# Altium PCB LaserTagMainBoard.PcbDoc
Units mil, origin at the board's own origin, x right, y up, seen from the top; angles counter-clockwise.
Board outline 3785 x 2125 mil, 2 copper layers (Top Layer, Bottom Layer); 27 components, 24 nets, 113 pads, 8 vias.
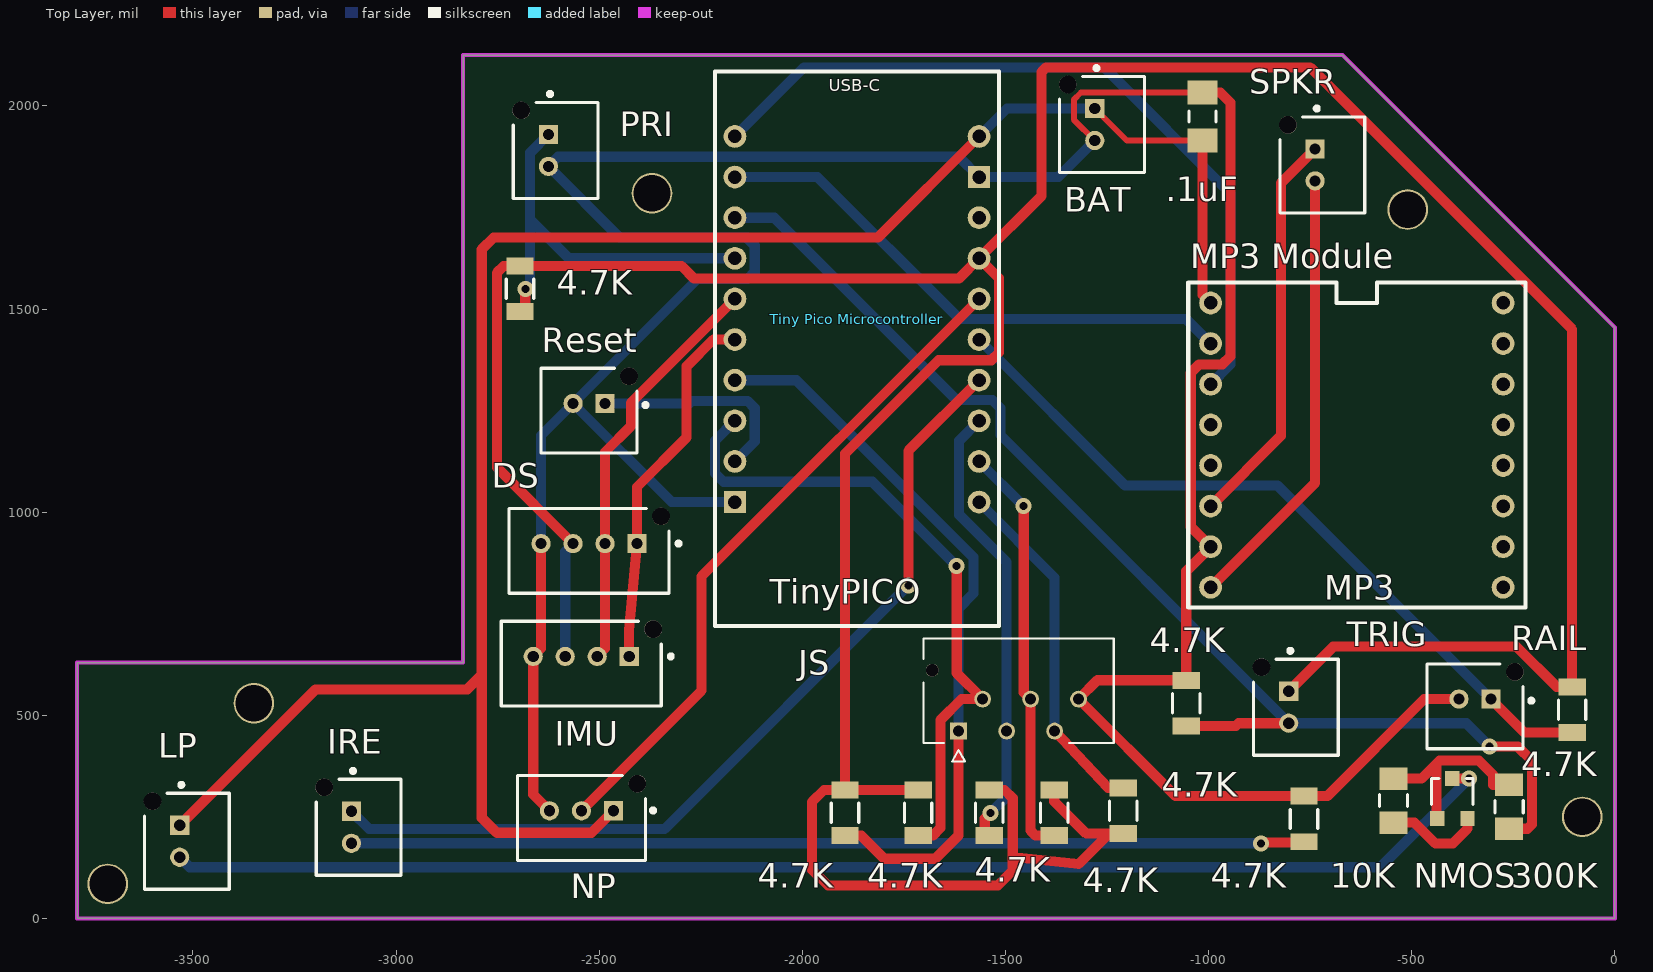
[diagram p0: Top Layer view]
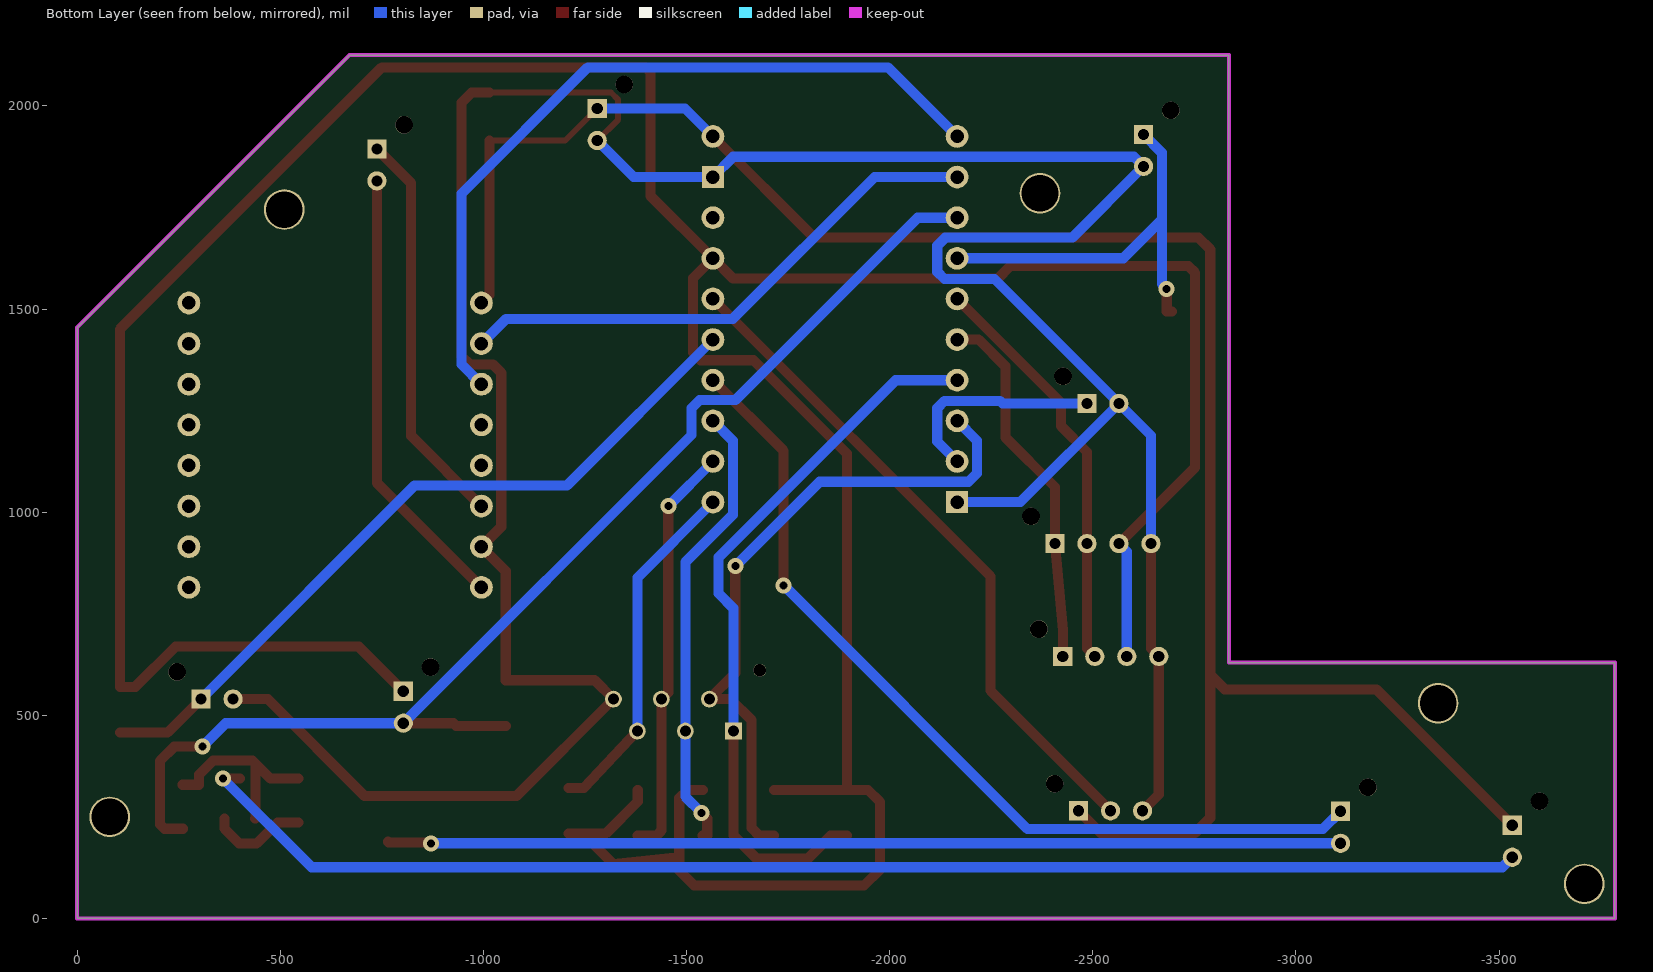
[diagram p1: Bottom Layer view, seen from below]

## Layer stack, top to bottom
Top Solder: solder mask 0.4, Solder Resist, Dk 3.5
Top Layer: signal copper 1.4
Dielectric 1: dielectric 12.6, FR-4, Dk 4.8
Bottom Layer: signal copper 1.4
Bottom Solder: solder mask 0.4, Solder Resist, Dk 3.5

## Board outline
-670,2125 0,1455 0,0 -3785,0 -3785,630 -2835,630 -2835,2125

## Design rules (kind name [scope] priority, off if disabled: settings)
BoardOutlineClearance [All] p1: gap=7.87 ignorepadtopadclearanceinfootprint=FALSE except(15.75: Arc-SplitBarrior Arc-SplitContinuation Track-SplitBarrior Track-SplitContinuation SMDPad-SplitBarrior SMDPad-SplitContinuation THPad-SplitBarrior THPad-SplitContinuation Via-SplitBarrior Via-SplitContinuation Fill-SplitBarrior Fill-SplitContinuation Poly-SplitBarrior Poly-SplitContinuation Region-SplitBarrior Region-SplitContinuation Text-SplitBarrior Text-SplitContinuation)
Clearance "Clearance Bottom Layer" [OnLayer('Bottom Layer')] p1: gap=8 ignorepadtopadclearanceinfootprint=TRUE except(10: Arc-Text Track-Text SMDPad-Text THPad-Text Via-Text Fill-Text Poly-Text Region-Text Text-Text)
Clearance "Clearance Top Layer" [OnLayer('Top Layer')] p2: gap=8 ignorepadtopadclearanceinfootprint=TRUE except(10: Arc-Text Track-Text SMDPad-Text THPad-Text Via-Text Fill-Text Poly-Text Region-Text Text-Text)
Clearance [All] p3: gap=7.87 ignorepadtopadclearanceinfootprint=FALSE except(3.5: Arc-Arc Arc-Track Arc-SMDPad Track-Track Track-SMDPad SMDPad-SMDPad; 5: Arc-Via Track-Via SMDPad-Via THPad-Via Via-Via; 10: Arc-Text Track-Text SMDPad-Text THPad-Text Via-Text Fill-Text Poly-Text Region-Text Text-Text)
HoleSize [All] p1: absolutevalues=TRUE maxlimit=248.03 minlimit=7.87 maxpercent=80.000 minpercent=20.000
MinimumAnnularRing [All] p1: minimumring=3
MinimumSolderMaskSliver [All] p1: minsoldermaskwidth=3.94
PolygonConnect PolygonConnect_1 [All] p1: thpad.connectstyle=Relief thpad.reliefconductorwidth=20 thpad.reliefentries=4 thpad.polygonreliefangle="90 Angle" thpad.airgapwidth=10 smdpad.connectstyle=Relief smdpad.reliefconductorwidth=20 smdpad.reliefentries=4 smdpad.polygonreliefangle="90 Angle" smdpad.airgapwidth=10 via.connectstyle=Direct via.reliefconductorwidth=20 via.reliefentries=4 via.polygonreliefangle="90 Angle" via.airgapwidth=10
RoutingCorners [All] p1: cornerstyle=Round minsetback=100 maxsetback=100
RoutingVias [All] p1: holewidth=19.68 width=39.37 viastyle="Through Hole" minholewidth=7.87 minwidth=17.72 maxholewidth=39.37 maxwidth=78.74
SilkToSilkClearance [All] p1: silktosilkclearance=3.94
SilkToSolderMaskClearance [IsPad] p1: minsilkscreentomaskgap=3.94 clearancetoexposedcopper=TRUE
SolderMaskExpansion [All] p1: expansion=4 istentingtop=FALSE
Width [All] p1: maxlimit=100 minlimit=3.5 preferedwidth=25 minimp=50.000000 maximp=50.000000 favimp=50.000000
25 further rules are at their usual default settings.

## Classes and differential pairs
component class LaserTagTargetBoard: Battery

## Components (designator, comment, footprint, x,y, rotation, side; value= is the part's Value field where it differs from the comment)
4.7K "RC1206FR-074K7L" FP-RC1206-0_65-IPC_B -2695,1550 r90 top (schematic designator "4.7K PUR Primer")
4.7K "RC1206FR-074K7L" FP-RC1206-0_65-IPC_B -1210,265 r270 top (schematic designator "4.7K PUR JS5")
4.7K "RC1206FR-074K7L" FP-RC1206-0_65-IPC_B -1380,260 r90 top (schematic designator "4.7K PUR JS4")
4.7K "RC1206FR-074K7L" FP-RC1206-0_65-IPC_B -1540,260 r90 top (schematic designator "4.7K PUR JS3")
4.7K "RC1206FR-074K7L" FP-RC1206-0_65-IPC_B -1715,260 r90 top (schematic designator "4.7K PUR JS2")
4.7K "RC1206FR-074K7L" FP-RC1206-0_65-IPC_B -1895,260 r90 top (schematic designator "4.7K PUR JS1")
4.7K "RC1206FR-074K7L" FP-RC1206-0_65-IPC_B -105,513.82 r90 top (schematic designator "4.7K PUR Clip")
4.7K "RC1206FR-074K7L" FP-RC1206-0_65-IPC_B -1055,530 r90 top (schematic designator "4.7K PDR Trigger")
4.7K "RC1206FR-074K7L" FP-RC1206-0_65-IPC_B -765,245 r90 top (schematic designator "4.7K PDR")
10K "RMCF1206FT10K0" FP-RMCF1206-IPC_B -545,290 r270 top
300K "RMCF1206JT300R" FP-RMCF1206-IPC_B -260,275 r90 top
.1uF "C1206C104K5RACTU" KEMT-1206-2_M -1015,1974.06 r90 top
BAT "B02B-PASK-1(LF)(SN)" FP-B02B-PASK-1_LF_SN-MFG -1262.28,1954.37 r90 top (schematic designator Battery)
DS "B04B-PASK-1(LF)(SN)" FP-B04B-PASK-1_LF_SN-MFG -2525,905 r0 top (schematic designator "Display Screen")
IMU "B04B-PASK-1(LF)(SN)" FP-B04B-PASK-1_LF_SN-MFG -2544.37,627.28 r0 top
IRE "B02B-PASK-1(LF)(SN)" FP-B02B-PASK-1_LF_SN-MFG -3092.28,224.37 r90 top (schematic designator "IR Emitter")
JS "5031590600" MOLEX_5031590600 -1615.28,461.26 r0 top (schematic designator Joystick)
LP "B02B-PASK-1(LF)(SN)" FP-B02B-PASK-1_LF_SN-MFG -3515,190 r90 top (schematic designator "Laser Pointer")
"MP3 Module" "MP3 Module" HW-247A -635,1165 r0 top
NMOS "2N7002" STM-SOT-23-3_V -400,295 r0 top
NP "B03B-PASK-1(LF)(SN)" FP-B03B-PASK-1_LF_SN-MFG -2543.74,247.28 r0 top (schematic designator "Neopixels 3V")
PRI "B02B-PASK-1(LF)(SN)" FP-B02B-PASK-1_LF_SN-MFG -2607.28,1890.63 r90 top (schematic designator Primer)
RAIL "B02B-PASK-1(LF)(SN)" FP-B02B-PASK-1_LF_SN-MFG -344.37,522.28 r0 top (schematic designator Rails)
Reset "B02B-PASK-1(LF)(SN)" FP-B02B-PASK-1_LF_SN-MFG -2525,1250 r0 top
SPKR "B02B-PASK-1(LF)(SN)" FP-B02B-PASK-1_LF_SN-MFG -720,1855 r90 top (schematic designator "Speaker Socket")
"Tiny Pico Microcontroller" "TinyPICO" TinyPICO -1865.5,1510.25 r0 top
TRIG "B02B-PASK-1(LF)(SN)" FP-B02B-PASK-1_LF_SN-MFG -785,520 r90 top (schematic designator Trigger)

## Footprints (in the part's own frame and the unit in brackets; to place one, negate y for a bottom-side part, rotate by r counter-clockwise, add the part's x,y. Pads: shape width x height; smd on the part's side, far side on the other; paste and mask are expansions set on the pad)
FP-B02B-PASK-1_LF_SN-MFG [mm]
  rect 1.2x1.2 hole 0.7 paste-1000 mask+0: 1(1,0.45)
  round 1.2 hole 0.7 paste-1000 mask+0: 2(-1,0.45)
  round 1.1 hole 1.1 unplated paste-1000 mask+0: ""(2.5,2.15)
  silkscreen extent -3,-2.65 3.65,2.65, body extent -3.1,-2.75 3.15,2.8, height 0.25
FP-B03B-PASK-1_LF_SN-MFG [mm]
  rect 1.2x1.2 hole 0.7 paste-1000 mask+0: 1(2,0.45)
  round 1.2 hole 0.7 paste-1000 mask+0: 2(0,0.45) 3(-2,0.45)
  round 1.1 hole 1.1 unplated paste-1000 mask+0: ""(3.5,2.15)
  silkscreen extent -4,-2.65 4.6,2.65, body extent -4.1,-2.75 4.15,2.8, height 0.25
FP-B04B-PASK-1_LF_SN-MFG [mm]
  rect 1.2x1.2 hole 0.7 paste-1000 mask+0: 1(3,0.45)
  round 1.2 hole 0.7 paste-1000 mask+0: 2(1,0.45) 3(-1,0.45) 4(-3,0.45)
  round 1.1 hole 1.1 unplated paste-1000 mask+0: ""(4.5,2.15)
  silkscreen extent -5,-2.65 5.72,2.65, body extent -5.1,-2.75 5.15,2.8, height 0.25
FP-RC1206-0_65-IPC_B [mil]
  rect 41.66x67.41 smd paste+0 mask+0: 1(-56.18,0) 2(56.18,0)
  silkscreen extent -24,-34 24,34
FP-RMCF1206-IPC_B [mil]
  rect 55.27x69.22 smd paste+0 mask+0: 1(-54.16,0) 2(54.16,0)
  silkscreen extent -15,-35 15,35, body extent -92,-44 92,44, height 10
HW-247A [mil]
  round 56 hole 33.25: 01(-360,50) 02(-360,-50) 03(360,350) 04(360,250) 05(360,150) 06(360,50) 07(360,-50) 08(360,-150) 09(360,-250) 10(360,-350) GND(-360,-250) Rx(-360,250) Spk1(-360,-150) Spk2(-360,-350) Tx(-360,150) Vcc(-360,350)
  silkscreen extent -415,-400 415,400
KEMT-1206-2_M [mm] "SMD, 2-Leads, Body 3.4x1.8mm, IPC Low Density"
  rect 1.5x1.9 smd: 1(-1.5,0) 2(1.5,0)
  silkscreen extent -0.35,-0.85 0.35,0.85, body extent -1.7,-0.9 1.7,0.9, height 0.88
MOLEX_5031590600 [mm]
  rect 1.05x1.05 / inner round 1.05 / far side rect 1.05x1.05 hole 0.7 mask+0.076: 1(0,0)
  round 1.05 hole 0.7 mask+0.076: 2(1.5,2) 4(4.5,2) 6(7.5,2)
  round 1.05 hole 0.7 mask+0.101: 3(3,0) 5(6,0)
  round 0.8 hole 0.8 unplated mask+0.076: ""(-1.65,3.8)
  silkscreen extent -2.2,-1.89 9.7,5.79
STM-SOT-23-3_V [mm] "SOT23, 3-Leads, Body 3.016x2.8mm, Pitch 0.95mm"
  rect 0.9x0.95 smd: 1(-0.95,-1.25) 2(0.95,-1.25) 3(0,1.25)
  silkscreen extent -1.3,-0.38 1.3,1.25, body extent -1.14,-1.25 1.17,1.36, height 1.25
TinyPICO [mil]
  round 56 hole 33.25: 3V3(300.5,114.75) 4(300.5,14.75) 5(-300.5,114.75) 5V(300.5,214.75) 14(300.5,-85.25) 15(300.5,-185.25) 18(-300.5,214.75) 19(-300.5,314.75) 21(-300.5,-85.25) 22(-300.5,14.75) 23(-300.5,414.75) 25(300.5,-485.25) 26(300.5,-385.25) 27(300.5,-285.25) 32(-300.5,-185.25) 33(-300.5,-285.25) BAT(300.5,414.75) RST(-300.5,-385.25)
  rect 54x54 hole 33.25: GND1(300.5,314.75) GND2(-300.5,-485.25)
  silkscreen extent -350,-790 350,575

## Part data
4.7K 4.7K 4.7K 4.7K 4.7K 4.7K 4.7K 4.7K 4.7K: library part CMP-03412-037805-1, "RES SMD 4.7K OHM 1% 1/4W 1206", Case Code (Imperial)=1206, Case Code (Metric)=3216, Max Operating Temperature=155°C, Max Power Dissipation=250mW, Min Operating Temperature=-55°C, Package Quantity=1, Resistance=4.7kR, Resistance Tolerance=1%, Resistor Type="Thick Film", Temperature Coefficient=100ppm/°C, Voltage Rating=200V, Case/Package=1206, Construction=Rectangular, Depth=1.6mm, Features="Moisture Resistant", Height=0.026inch, Lead Free="Lead Free", Length=0.122inch, Military Standard=Not, Number of Pins=2, Number of Terminations=2, Packaging="Tape and Reel", Power Rating=250mW, RoHS Compliant=Yes, Series=RC, Size Code=1206, Termination=SMD/SMT, Tolerance=1%, Voltage Rating (DC)=200V, Width=0.063inch
10K: library part CMP-26527-000151-1, "10kΩ ±1% 0.25W 1206 Thick Film Chip Resistor AEC-Q200 compliant", Case Code (Imperial)=1206, Case Code (Metric)=3216, Max Operating Temperature=155°C, Max Power Dissipation=250mW, Min Operating Temperature=-55°C, Resistance=10kR, Resistor Type="Thick Film", Temperature Coefficient=100ppm/°C, Tolerance=1%, Case/Package=1206, Construction=Rectangular, Contact Plating=Tin, Depth=1.6mm, Features="Automotive AEC-Q200", Height=0.028inch, Lead Free="Lead Free", Length=3.2mm, Military Standard=Not, Mount="Surface Mount", Number of Terminations=2, Packaging="Tape and Reel", Power Rating=250mW, Radiation Hardening=No, RoHS Compliant=Yes, Series=RMCF, Size Code=1206, Width=0.063inch
300K: library part CMP-26527-001830-1, "300Ω ±5% 0.25W 1206 Thick Film Chip Resistor AEC-Q200 compliant", Case Code (Imperial)=1206, Case Code (Metric)=3216, Max Operating Temperature=155°C, Max Power Dissipation=250mW, Min Operating Temperature=-55°C, Resistance=300R, Resistor Type="Thick Film", Temperature Coefficient=200ppm/°C, Tolerance=5%, Case/Package=1206, Construction=Rectangular, Contact Plating=Tin, Depth=1.6mm, Features="Automotive AEC-Q200", Height=0.028inch, Lead Free="Lead Free", Length=3.2mm, Military Standard=Not, Mount="Surface Mount", Number of Terminations=2, Packaging="Tape and Reel", Radiation Hardening=No, RoHS Compliant=Yes, Series=RMCF, Width=0.063inch
.1uF: library part CMP-1037-04202-2, "CAP, Ceramic, 0.1 uF, +/- 10%, 50 V, -55 to 125 degC, 1206 (3216 Metric), RoHS, Tape and Reel", Capacitance=0.1µF, Capacitance Tolerance=±10%, Capacitor Case Style=1206[3216Metric], Dielectric Characteristic=X7R, Manufacturer=Kemet, Operating Temperature Max=125degC, Operating Temperature Min=-55degC, Package Description="2-Leads SMD, Body 3.2 x 1.6 mm", Package Reference=1206-2, Voltage Rating=50V, Datasheet URL=https://datasheet.ciiva.com/6125/1725438-6125494.pdf, Datasheet Version=Jul-13, Manufacturer URL=http://www.kemet.com/, Packaging=Tape&Reel, Product Range=KEMET-CSeries, SVHC=ToBeAdvised
BAT IRE LP PRI RAIL Reset SPKR TRIG: library part CMP-17439-000415-1, "CONN HEADER VERT 2POS 2MM", Color=Natural, Current Rating=3A, Flammability Rating="UL94 V-0", Housing Color=White, Insulation Resistance=1GR, Max Operating Temperature=85°C, Min Operating Temperature=-25°C, Voltage Rating=250V, Connector Type=Header, Contact Finish - Mating=TIN, Contact Material="Copper Alloy", Contact Mating Length=0.126inch, Contact Plating=Tin, Contact Shape=Square, Contact Type="Male Pin", Fastening Type=Ramp, Gender=Male, Insulation Color=Natural, Insulation Material=PBT, Lead Free="Lead Free", Mated Stacking Heights=14.9mm, Material=Polybutylene, Mount="Through Hole", Number of Contacts=2, Number of Positions=2, Number of Rows=1, Orientation=Straight, Packaging=Bulk, Pitch=2mm, Series=PA, Termination=Solder
DS IMU: library part CMP-17439-000192-1, "CONN HEADER VERT 4POS 2MM", Color=Natural, Contact Resistance=20mR, Current Rating=3A, Flammability Rating="UL94 V-0", Housing Color=White, Max Operating Temperature=85°C, Max Voltage Rating (AC)=250V, Min Operating Temperature=-25°C, Connector Type=Header, Contact Finish - Mating=TIN, Contact Material="Copper Alloy", Contact Mating Length=0.126inch, Contact Plating=Copper, Contact Shape=Square, Contact Type="Male Pin", Depth=5.3mm, Fastening Type=Ramp, Gender=Male, Insulation Color=Natural, Insulation Material=PBT, Lead Free="Lead Free", Length=10mm, Mated Stacking Heights=14.9mm, Max Current Rating=3A, Mount="Through Hole", Number of Contacts=4, Number of Positions=4, Number of Rows=1, Orientation=Straight, Packaging=Bulk, Pitch=2mm, Series=PA, Termination=Solder, Voltage Rating=250V
JS: "1.50mm Pitch, CLIK-Mate PCB Receptacle, Single Row, Through Hole, Vertical, Tin Plating, Positive Lock, with Peg, 6 Circuits, Natural", Package=None, Availability=Unavailable, MP=5031590600, Price=None
"MP3 Module": library part Component_1
NMOS: library part CMP-0434-00001-1, "N-channel 60 V, 1.8 Ohm, 0.35 A STripFET(TM) II Power MOSFET, SOT23", Manufacturer=STMicroelectronics, ComponentLink1Description="Manufacturer URL", ComponentLink1URL=http://www.st.com/, ComponentLink2Description=Datasheet, ComponentLink2URL=http://www.st.com/st-web-ui/static/active/en/resource/technical/document/datasheet/CD00005134.pdf, DatasheetVersion="Rev. 9, 11/2008", Mounting Technology="Surface Mount", PackageDescription="3-Pin SOT23, 3.016 x 2.8 mm Body, 0.95 mm Pitch", PackageReference=SOT-23, PartNumber=2N7002
NP: library part CMP-17439-000193-1, "CONN HEADER VERT 3POS 2MM", Color=Natural, Current Rating=3A, Flammability Rating="UL94 V-0", Housing Color=White, Voltage Rating=250V, Connector Type=Header, Contact Finish - Mating=TIN, Contact Material="Copper Alloy", Contact Mating Length=0.126inch, Contact Plating=Tin, Contact Shape=Square, Contact Type="Male Pin", Fastening Type=Ramp, Insulation Color=Natural, Insulation Material=PBT, Lead Free="Lead Free", Mated Stacking Heights=14.9mm, Mount="Through Hole", Number of Contacts=3, Number of Positions=3, Number of Rows=1, Orientation=Straight, Packaging=Bulk, Pitch=2mm, Series=PA, Termination=Solder

## Free pads (board coordinates)
  round 100 hole 90: 1(-2370,1785) 2(-3350,530) 3(-3710,85) 4(-80,250) 5(-510,1745)

## Via types
v1: diameter 39.37, hole 19.68, Top Layer to Bottom Layer, 8 vias

## Nets (pads, with @x,y where several pads share a name; then routed paths per layer and width w, separated by ;. In a path a pad name is that pad's centre, name@x,y a point inside that pad or via, vN(x,y) a via of type N, cw(c..) or ccw(c..) an arc to the next point about the centre after c; other vN are vias at no path point)
3VESP: 4.7K.2@-105,570 4.7K.2@-1210,208.82 4.7K.2@-1380,316.18 4.7K.2@-1540,316.18 4.7K.2@-1715,316.18 4.7K.2@-1895,316.18 4.7K.2@-2695,1606.18 "Tiny Pico Microcontroller.3V3" DS.3 IMU.3 TRIG.1 | length 9294.6
  Top Layer w25: DS.3 -2752,1110.35 -2752,1589.18 -2735,1606.18 -2695,1606.18 -2297.18,1606.18 -2266,1575 -1615,1575 -1565,1625 ; 4.7K.2@-1715,316.18 -1833,316.18 -1833.18,316 -1895,316 4.7K.2@-1895,316.18 ; 4.7K.2@-1540,316.18 -1502.18,316.18 -1482,296 -1482,151 ; 4.7K.2@-1380,316.18 -1380,288 -1300.82,208.82 -1245,208.82 ; 4.7K.2@-1210,208.82 -1245,208.82 ; TRIG.1 -693,669.09 -242.09,669.09 -143,570 -105,570 -105,1450 -750,2095 -1400,2095 -1411,2084 -1411,1779 -1565,1625 ; 4.7K.2@-1895,316.18 -1946.82,316.18 -1976,287 -1976,120 -1937,81 -1519,81 -1482,118 -1482,151 ; 4.7K.2@-1895,316.18 -1895,1144 -1665,1374 -1535,1374 -1516,1393 -1516,1576 -1565,1625 ; -1482,151 -1319.82,134 -1245,208.82
  Bottom Layer w25: IMU.3 -2583.74,903.35 DS.3
BAT: "MP3 Module.Vcc" "Tiny Pico Microcontroller.BAT" .1uF.1 BAT.1 LP.1 NP.1 | length 5016.5
  Top Layer w15: BAT.1 -1201.26,1915 .1uF.1
  Top Layer w25: LP.1 -3198.09,564 -2825,564 -2789,600 ; NP.1 -2519,211 -2752,211 -2789,248 -2789,600 ; -1565,1925 -1814,1676 -2760,1676 -2789,1647 -2789,600 ; .1uF.1 -1015,1535 -995,1515
  Bottom Layer w25: -1565,1925 -1496.26,1993.74 BAT.1
CLIP: 4.7K.1@-105,457.64 "Tiny Pico Microcontroller.14" RAIL.1 | length 1860.7
  Top Layer w25: RAIL.1 -222.64,457.64 4.7K.1@-105,457.64
  Bottom Layer w25: -1565,1425 -1206,1066 -831,1066 RAIL.1
GND: 4.7K.2@-765,301.18 4.7K.2@-1055,586.18 "MP3 Module.GND" "Tiny Pico Microcontroller.GND1" "Tiny Pico Microcontroller.GND2" .1uF.2 BAT.2 DS.4 IMU.4 JS.6 NP.3 PRI.2 RAIL.2 Reset.2 | length 7690.6
  Top Layer w15: BAT.2 -1331.54,1966.54 -1331.54,2015.64 -1314.07,2033.11 .1uF.2
  Top Layer w25: DS.4 -2643.11,664.37 IMU.4 -2662.48,305 NP.3 ; .1uF.2 -971.11,2033.11 -946,2008 -946,1384 -966,1364 -1023,1364 -1044,1343 -1044,964 -995,915 -1055,855 -1055,586.18 -1273.82,586.18 JS.6 -1081.18,301.18 -765,301.18 -707.82,301.18 -469,540 RAIL.2
  Bottom Layer w25: DS.4 -2643.11,1188.98 Reset.2 ; -2166,1025 -2321.65,1025 Reset.2 ; BAT.2 -1370,1825 -1565,1825 -1615,1875 -2601.26,1875 PRI.2 -2449.74,1676 -2137,1676 -2117,1656 -2117,1592 -2135,1574 -2258.09,1574 Reset.2
IRE: "Tiny Pico Microcontroller.15" IRE.1 | length 2214.7
  Top Layer w25: v1(-1739,820) -1739,1151 -1565,1325
  Bottom Layer w25: IRE.1 -3066.26,220 -2339,220 v1(-1739,820)
JS1: 4.7K.1@-1895,203.82 "Tiny Pico Microcontroller.32" JS.1 | length 1794.1
  Top Layer w25: 4.7K.1@-1895,203.82 -1855,203.82 -1798.18,147 -1673,147 -1615.28,204.72 JS.1
  Bottom Layer w25: -2166,1325 -2015,1325 -1579,889 -1579,800 -1615.28,763.72 JS.1
JS2: 4.7K.1@-1715,203.82 "Tiny Pico Microcontroller.33" JS.2 | length 1646.1
  Top Layer w25: 4.7K.1@-1715,203.82 -1679,203.82 -1660.2,222.62 -1660.2,488 -1608.2,540 JS.2 -1620,603.78 v1(-1620,867)
  Bottom Layer w25: -2166,1225 -2215,1176 -2215,1096 -2194,1075 -1828,1075 v1(-1620,867)
JS3: 4.7K.1@-1540,203.82 "Tiny Pico Microcontroller.27" JS.3 | length 1123.4
  Top Layer w25: 4.7K.1@-1540,203.82 -1551.14,203.82 -1551.14,245.86 v1(-1537,260)
  Bottom Layer w25: -1565,1225 -1614,1176 -1614,993.83 -1497.17,877 JS.3 -1497.17,299.83 v1(-1537,260)
JS4: 4.7K.1@-1380,203.82 "Tiny Pico Microcontroller.26" JS.4 | length 1024.7
  Top Layer w25: v1(-1455,1015) -1455,556.89 JS.4 -1438.11,216.11 -1425.82,203.82 4.7K.1@-1380,203.82
  Bottom Layer w25: -1565,1125 v1(-1455,1015)
JS5: 4.7K.1@-1210,321.18 "Tiny Pico Microcontroller.25" JS.5 | length 870.3
  Top Layer w25: JS.5 -1247,321.18 4.7K.1@-1210,321.18
  Bottom Layer w25: -1565,1025 -1379.05,839.05 JS.5
NEOPIX: "Tiny Pico Microcontroller.4" NP.2 | length 1665.4
  Top Layer w25: NP.2 -2248,560.74 -2248,842 -1565,1525
"Net4.7K PDR_1": 4.7K.1@-765,188.82 IRE.2 | length 2346.6
  Top Layer w25: v1(-871,185) -869.09,186.91 -766.91,186.91 4.7K.1@-765,188.82
  Bottom Layer w25: IRE.2 v1(-871,185)
Net10K_1: 10K.1 300K.2 NMOS.1 | length 479.7
  Top Layer w25: 10K.1 -475.84,344.16 -439,381 ; NMOS.1 -439,245.79 -439,381 ; 300K.2 -300,329.16 -300,354 -335,389 -431,389 -439,381
Net10K_2: 10K.2 NMOS.2 | length 243.4
  Top Layer w25: 10K.2 -493,235.84 -441.8,184.64 -399,184.64 -362.6,221.05 NMOS.2
"NetLaser Pointer_2": LP.2 NMOS.3 | length 3315.3
  Top Layer w25: NMOS.3 v1(-359,344.21)
  Bottom Layer w25: LP.2 -3508.09,126 -577.21,126 v1(-359,344.21)
PRIMER: 4.7K.1@-2695,1493.82 "Tiny Pico Microcontroller.5" PRI.1 | length 1016.1
  Top Layer w25: 4.7K.1@-2695,1493.82 -2682,1493.82 v1(-2682,1550)
  Bottom Layer w25: v1(-2682,1550) -2670,1562 -2670,1720 ; PRI.1 -2670,1885 -2670,1720 ; -2166,1625 -2575,1625 -2670,1720
RST: "Tiny Pico Microcontroller.RST" Reset.1 | length 530
  Bottom Layer w25: Reset.1 -2277.72,1267.72 -2271.44,1274 -2135,1274 -2117,1256 -2117,1174 -2166,1125
SCL: "Tiny Pico Microcontroller.22" DS.2 IMU.2 | length 1020.4
  Top Layer w25: IMU.2 -2485.63,664.37 DS.2 -2485.63,1148.37 -2422,1212 -2422,1269 -2166,1525
SDA: "Tiny Pico Microcontroller.21" DS.1 IMU.1 | length 911.7
  Top Layer w25: IMU.1 -2426.26,709.74 DS.1 -2406.89,1062 -2284.73,1184.16 -2284.73,1359.27 -2219,1425 -2166,1425
SPKR1: "MP3 Module.Spk1" SPKR.1 | length 985.9
  Top Layer w25: -995,1015 -822,1188 -822,1810.09 SPKR.1
SPKR2: "MP3 Module.Spk2" SPKR.2 | length 1107.2
  Top Layer w25: -995,815 -737.72,1072.28 SPKR.2
"SPKR Rx": "MP3 Module.Rx" "Tiny Pico Microcontroller.19" | length 1340.8
  Bottom Layer w25: -2166,1825 -1963,1825 -1614,1476 -1056,1476 -995,1415
"SPKR Tx": "MP3 Module.Tx" "Tiny Pico Microcontroller.23" | length 1908.5
  Bottom Layer w25: -2166,1925 -1996,2095 -1257,2095 -946,1784 -946,1364 -995,1315
TRIGGER: 4.7K.1@-1055,473.82 300K.1 "Tiny Pico Microcontroller.18" TRIG.2 | length 3026.3
  Top Layer w25: 4.7K.1@-1055,473.82 -933,473.82 -926.19,480.63 TRIG.2 ; v1(-308,423) -239,423 -204,388 -204,231.84 -215,220.84 300K.1
  Bottom Layer w25: -2166,1725 -2069,1725 -1620,1276 -1532,1276 -1512,1256 -1512,1189.91 TRIG.2 -365.63,480.63 v1(-308,423)
pads on no net: "MP3 Module.01" "MP3 Module.02" "MP3 Module.03" "MP3 Module.04" "MP3 Module.05" "MP3 Module.06" "MP3 Module.07" "MP3 Module.08" "MP3 Module.09" "MP3 Module.10" "Tiny Pico Microcontroller.5V" BAT. DS. IMU. IRE. JS. LP. NP. PRI. RAIL. Reset. SPKR. TRIG.

## Keep-outs
Keep-Out Layer:
  the board outline again, w10

## Text inside footprints (layer, text, board x,y; h text height)
"MP3 Module": Top Overlay "MP3" at -715,785 h60
"Tiny Pico Microcontroller": Top Overlay "USB-C" at -1934.5,2036.25 h30